# Altium PCB Template.PcbDoc
Units mm, origin at the board's own origin, x right, y up, seen from the top; angles counter-clockwise.
Board outline 80 x 60 mm, 4 copper layers (Top Layer, GroundPlane, PowerPlane, Bottom Layer), stack 1.483 mm thick; 88 components, 48 nets, 290 pads, 16 vias.
Unrouted connection lines stored in the file: 177.
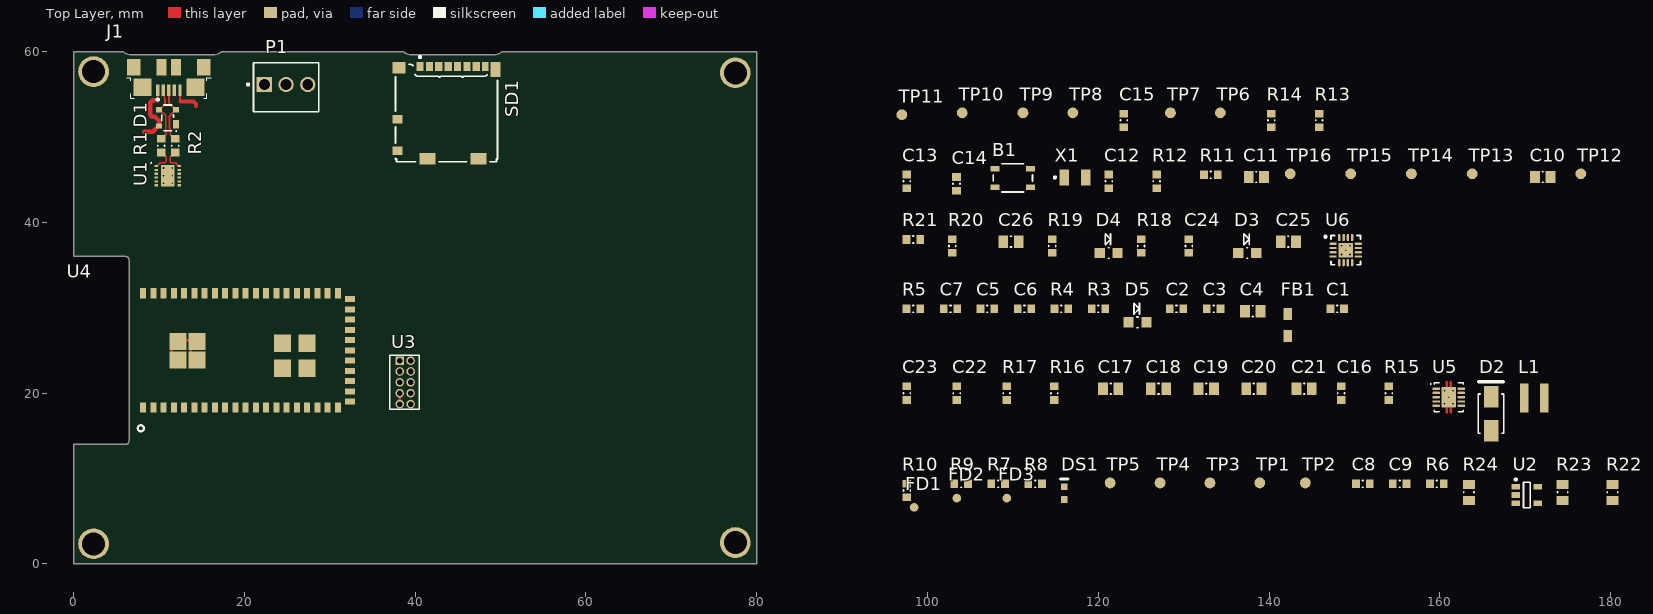
[diagram p0: Top Layer view]
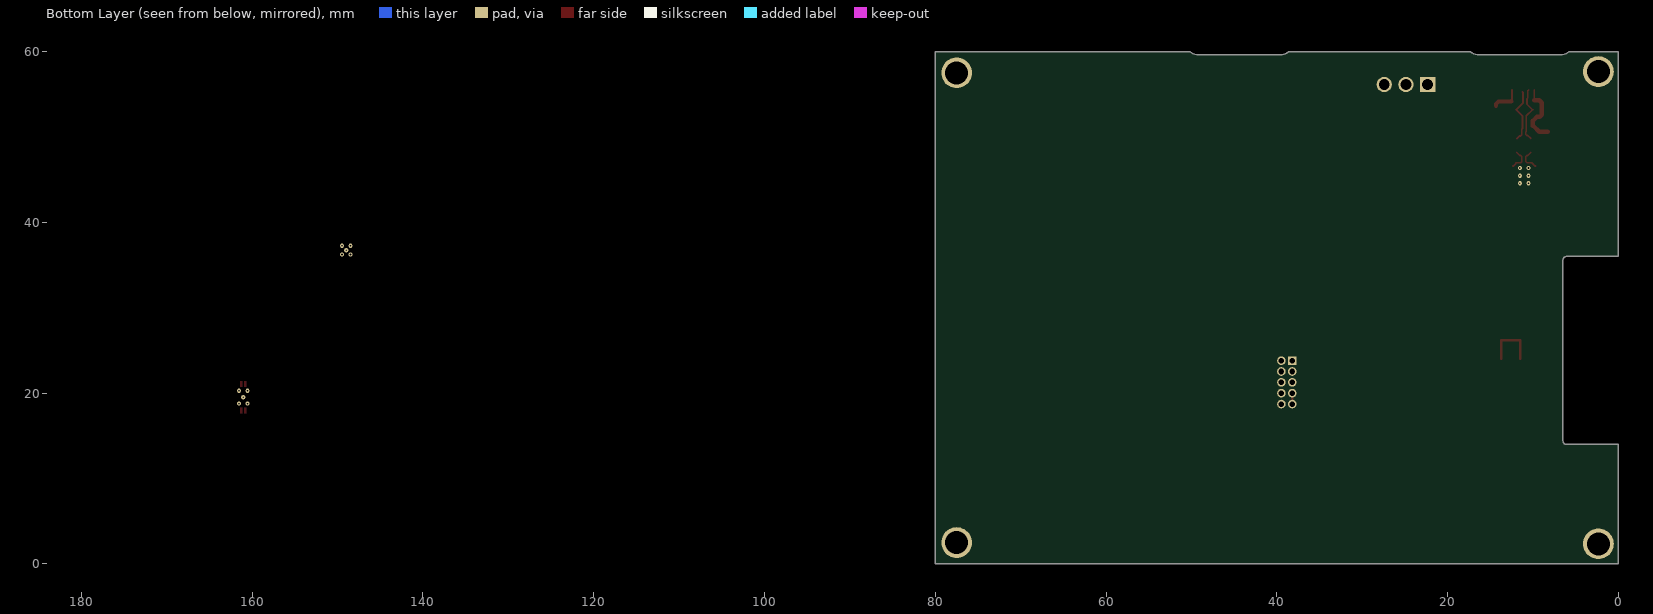
[diagram p1: Bottom Layer view, seen from below]

## Layer stack, top to bottom
Top Solder: solder mask 0.0254, Solder Resist, Dk 3.5
Top Layer: signal copper 0.0381
Dielectric1: prepreg 0.3302, PP-006, Dk 4.1
GroundPlane: signal copper 0.0178
Dielectric 2: core 0.7112, Core-009, Dk 4.5
PowerPlane: signal copper 0.0178
Dielectric 3: prepreg 0.3302, PP-006, Dk 4.1
Bottom Layer: signal copper 0.0381
Bottom Solder: solder mask 0.0254, Solder Resist, Dk 3.5

## Board outline
6.1,14 0,14 0,0 80,0 80,60 50.175,60 50.014,59.852 49.825,59.741 49.618,59.673 49.4,59.65 39.4,59.65 39.183,59.673 38.975,59.741 38.786,59.851 38.625,59.999 17.341,60 17.18,59.852 16.991,59.741 16.784,59.673 16.566,59.65 6.566,59.65 6.349,59.673 6.141,59.741 5.952,59.851 5.791,59.999 0,60 0,36 6.1,36 6.189,35.99 6.274,35.961 6.35,35.913 6.413,35.85 6.461,35.774 6.49,35.689 6.5,35.6 6.5,14.4 6.49,14.311 6.461,14.226 6.413,14.15 6.35,14.087 6.274,14.039 6.189,14.01

## Design rules (kind name [scope] priority, off if disabled: settings)
AcuteAngle [All] p1: minimum=6.00000000000000E+0001 checktracksonly=TRUE
AssemblyTestPointUsage [All] p1 off: allowmultiple=TRUE
AssemblyTestpoint [All] p1 off: testpointundercomponent=TRUE minsize=0.762 maxsize=2.54 preferedsize=1.524 minholesize=0 maxholesize=1.016 preferedholesize=0.813 testpointgrid=0.025 usegrid=FALSE gridtolerance=0 allowsidebottom=TRUE
BoardOutlineClearance "BoardOutlineClearance_Inner Layer" [OnLayer('GroundPlane')OR OnLayer('PowerPlane')] p1: gap=0.508 ignorepadtopadclearanceinfootprint=FALSE
BoardOutlineClearance BoardOutlineClearance_OuterLayers [All] p2: gap=0.254 ignorepadtopadclearanceinfootprint=FALSE except(0.508: SMDPad-OutlineEdge SMDPad-CavityEdge SMDPad-CutoutEdge THPad-OutlineEdge THPad-CavityEdge THPad-CutoutEdge)
Clearance [All] p1: gap=0.152 ignorepadtopadclearanceinfootprint=FALSE except(0.254: SMDPad-THPad)
DiffPairsRouting [All] p1: maxlimit=0.254 minlimit=0.152 mostfreqgap=0.254 toplayer_minwidth=0.152 toplayer_maxwidth=0.635 toplayer_prefwidth=0.381 midlayer1_minwidth=0.152 midlayer1_maxwidth=0.635 midlayer1_prefwidth=0.381 midlayer2_minwidth=0.152 midlayer2_maxwidth=0.635 midlayer2_prefwidth=0.381 bottomlayer_minwidth=0.152 bottomlayer_maxwidth=0.635 bottomlayer_prefwidth=0.381 maxuncoupledlength=12.7
FabricationTestPointUsage [All] p1 off: valid=0 allowmultiple=TRUE
FabricationTestpoint [All] p1 off: side=2 testpointundercomponent=TRUE minsize=0.762 maxsize=2.54 preferedsize=1.524 minholesize=0 maxholesize=1.016 preferedholesize=0.813 testpointgrid=0.025 allowsidebottom=TRUE usegrid=FALSE gridtolerance=0
HoleSize [All] p1: absolutevalues=TRUE maxlimit=3.81 minlimit=0.203 maxpercent=80.000 minpercent=20.000
MinimumAnnularRing [All] p1: minimumring=0.152
MinimumSolderMaskSliver [All] p1: minsoldermaskwidth=0.051
PlaneClearance [All] p1: clearance=0.254
PlaneConnect [All] p1: pad.planeconnectstyle=Relief pad.reliefexpansion=0.508 pad.reliefentries=4 pad.reliefconductorwidth=0.254 pad.reliefairgap=0.254 via.planeconnectstyle=Direct via.reliefexpansion=0.508 via.reliefentries=4 via.reliefconductorwidth=0.254 via.reliefairgap=0.254
PolygonConnect [All] p1: thpad.connectstyle=Relief thpad.reliefconductorwidth=0.254 thpad.reliefentries=4 thpad.polygonreliefangle="90 Angle" thpad.airgapwidth=0.203 smdpad.connectstyle=Relief smdpad.reliefconductorwidth=0.254 smdpad.reliefentries=4 smdpad.polygonreliefangle="90 Angle" smdpad.airgapwidth=0.203 via.connectstyle=Direct via.reliefconductorwidth=0.254 via.reliefentries=4 via.polygonreliefangle="90 Angle" via.airgapwidth=0.203
RoutingVias [All] p1: holewidth=0.203 width=0.508 viastyle="Through Hole" minholewidth=0.203 minwidth=0.508 maxholewidth=0.762 maxwidth=1.27
SMDNeckDown [All] p1: percent=90.000
SMDToCorner [All] p1: distance=0
SMDToPlane [All] p1: distance=0
SilkToSilkClearance [All] p1: silktosilkclearance=0
SilkToSolderMaskClearance [IsPad] p1: minsilkscreentomaskgap=0.051 clearancetoexposedcopper=TRUE
SolderMaskExpansion [All] p1: expansion=0.051 istentingtop=FALSE
UnRoutedNet [All] p1: checkbadconnections=TRUE
ViasUnderSMD [All] p1: allowed=FALSE
Width [All] p1: maxlimit=25.4 minlimit=0.152 preferedwidth=0.254
18 further rules are at their usual default settings.

## Classes and differential pairs
component class U_Thumbstick: R31 U6
component class Designator: C23
component class U_Memory: C12 R27 R28 SD1 TP15 TP17 TP18 TP19 TP20 TP21
component class U_MCU: B2 C8 C9 C10 C11 C12 D3 R15 R16 R25 R26 R31 TP12 TP14 TP21 X1
component class U_3.3VBuck: C14 C16 C17 L1 R23 R24 R25 R26 R27 U3
component class U_FTDI: C1 C2 C3 C4 C5 C6 C7 D2 FB1 J4 R1 R2 R3 R4 R5 U1
component class U_Audio: C18 C19 C20 C21 C22 J4 R28 R29 R30 U5
component class MAIN: DS1 FD1 FD2 FD3 J2 P1 P2 R6 R10 R12 R17 R18 R19 R20 R25 R28 TP1 TP2 TP3 TP4 TP5 TP15 TP17 TP18 TP19 TP20
differential pair USB_FTDI_DATA_4: +USB_FTDI_DATA_P -USB_FTDI_DATA_N
differential pair USB_DATA: +USB_DATA_P -USB_DATA_N

## Components (designator, comment, footprint, x,y, rotation, side; value= is the part's Value field where it differs from the comment)
B1 "PTS810 SJK 250 SMTR LFS" "PTS810 SJK 250 SMTR LFS" 110,45.2 r0 top (schematic designator B2)
C1 "100nF 16V" CAPC0603(1608)100_N 147.984,29.857 r0 top value=100nF
C2 "10nF 16V" CAPC0603(1608)100_N 129.163,29.857 r0 top value=10nF
C3 "100nF 16V" CAPC0603(1608)100_N 133.506,29.857 r0 top value=100nF
C4 "4.7uF 16V" CAPC0805(2012)145_N 138.078,29.603 r0 top value=4.7uF
C5 "47pF 16V" CAPC0603(1608)100_N 107.014,29.857 r0 top value=47pF
C6 "47pF 16V" CAPC0603(1608)100_N 111.358,29.857 r0 top value=47pF
C7 "100nF 16V" CAPC0603(1608)100_N 102.696,29.857 r0 top value=100nF
C8 "1uF 16V" CAPC0603(1608)100_N 150.982,9.359 r0 top value=1uF
C9 "1uF 16V" CAPC0603(1608)100_N 155.3,9.359 r0 top value=10uF
C10 "10uF 16V" CAPC0805(2012)145_N 172.038,45.3 r0 top value=10uF
C11 "CAP 10uF 16V 0805(2012)" CAPC0805(2012)145_N 138.51,45.3 r0 top value=1uF
C12 "1uF 16V" CAPC0603(1608)100_N 121.238,44.792 r90 top (schematic designator B1)
C13 "18pF 16V" CAPC0603(1608)100_N 97.591,44.792 r90 top value=18pF (schematic designator C12)
C14 "18pF 16V" CAPC0603(1608)100_N 103.4,44.5 r90 top value=18pF (schematic designator C13)
C15 "CAP 100nF 16V 0603(1608)" CAPC0603(1608)100_N 122.991,51.93 r90 top value=100nF (schematic designator C14)
C16 "1uF 16V" CAPC0603(1608)100_N 148.442,20.002 r90 top value=4.7uF
C17 "22uF 10V" CAPC0805(2012)145_N 121.441,20.51 r0 top value=22uF
C18 "22uF 10V" CAPC0805(2012)145_N 127.055,20.51 r0 top value=220pF
C19 "22uF 10V" CAPC0805(2012)145_N 132.643,20.51 r0 top value=1uF
C20 "22uF 10V" CAPC0805(2012)145_N 138.231,20.51 r0 top value=10uF
C21 "22uF 10V" CAPC0805(2012)145_N 144.098,20.51 r0 top value=1uF
C22 "100nF 16V" CAPC0603(1608)100_N 103.433,20.002 r90 top value=220pF
C23 "CAP 820pF 10V 0603(1608)" CAPC0603(1608)100_N 97.591,20.002 r90 top value=100nF
C24 "1uF 16V" CAPC0603(1608)100_N 130.611,37.223 r90 top value=120pF (schematic designator C15)
C25 "4.7uF 16V" CAPC0805(2012)145_N 142.269,37.731 r0 top (schematic designator D1)
C26 "4.7uF 16V" CAPC0805(2012)145_N 109.783,37.731 r0 top (schematic designator J1)
D1 "PRTR5V0U2X,215" NXP-SOT143B-4_V 11.02,52.236 r180 top (schematic designator D2)
D2 "B340A-13-F" DIOD-SMA-2_V 165.993,17.589 r90 top (schematic designator J4)
D3 "LTST-C170CKT" LTST-C170CKT_V 137.443,36.41 r0 top
D4 "LTST-C170GKT" LTST-C170GKT_V 121.213,36.41 r0 top (schematic designator P2)
D5 "LTST-C170CKT" LTST-C170CKT_V 124.591,28.282 r0 top value="10000.00 Ohm" (schematic designator R14)
DS1 "LTST-C191KGKT" LITE-ON-LTST-C191KRKT-2_V 116.006,8.292 r90 top
FB1 "BLM21PG221SN1D" MURA-BLM21-B20-CHIP-2_V2 142.168,27.977 r90 top
FD1 "40x100mm" Fiducial_FT 98.429,6.616 r0 top
FD2 "40x100mm" Fiducial_FT 103.433,7.708 r0 top
FD3 "40x100mm" Fiducial_FT 109.3,7.708 r0 top
J1 "ZX62R-B-5P" HIRO-ZX62R-B-5P_V 11.165,56.828 r180 top (schematic designator J2)
L1 "XFL4020-102MEC" COIL-XFL4020_V 171.048,19.418 r0 top value=470nH
P1 "640456-3" TECO-640456-3 24.892,56.134 r180 top
R1 "27R 1%" RESC0603(1608)_N 10.262,48.971 r270 top value="27.00 Ohm"
R2 "27R 1%" RESC0603(1608)_N 11.913,48.971 r270 top value="27.00 Ohm"
R3 "1K 1%" RESC0603(1608)_N 120.019,29.857 r0 top value="1000.00 Ohm"
R4 "Jumper" RESC0603(1608)_N 115.676,29.857 r0 top value="0.00 Ohm"
R5 "1K 1%" RESC0603(1608)_N 98.353,29.857 r0 top value="1000.00 Ohm"
R6 "1K 1%" RESC0603(1608)_N 159.643,9.359 r0 top value="0.00 Ohm"
R7 "1K 1%" RESC0603(1608)_N 108.284,9.359 r0 top value="1000.00 Ohm" (schematic designator R10)
R8 "27R 1%" RESC0603(1608)_N 112.602,9.359 r0 top value="27.00 Ohm" (schematic designator R11)
R9 "27R 1%" RESC0603(1608)_N 103.941,9.359 r0 top value="27.00 Ohm" (schematic designator R12)
R10 "27R 1%" RESC0603(1608)_N 97.591,8.597 r90 top value="27.00 Ohm" (schematic designator R13)
R11 "10K 1%" RESC0603(1608)_N 133.176,45.554 r0 top value="10000.00 Ohm" (schematic designator R17)
R12 "100R 1%" RESC0603(1608)_N 126.826,44.792 r90 top value="100.00 Ohm" (schematic designator R18)
R13 "10K 1% 0603(1608)" RESC0603(1608)_N 145.851,51.93 r90 top value="10000.00 Ohm" (schematic designator R19)
R14 "10K 1% 0603(1608)" RESC0603(1608)_N 140.263,51.93 r90 top value="10000.00 Ohm" (schematic designator R20)
R15 "150K 1% 0603(1608)" RESC0603(1608)_N 154.03,20.002 r90 top value="100.00 Ohm"
R16 "39K 1% 0603(1608)" RESC0603(1608)_N 114.863,20.002 r90 top value="10000.00 Ohm"
R17 "68K1 1%" RESC0603(1608)_N 109.275,20.002 r90 top value="453000.00 Ohm" (schematic designator R25)
R18 "1K 1%" RESC0603(1608)_N 125.023,37.223 r90 top value="100000.00 Ohm" (schematic designator R26)
R19 "1K 1%" RESC0603(1608)_N 114.609,37.223 r90 top value="100000.00 Ohm" (schematic designator R27)
R20 "1K13 1%" RESC0603(1608)_N 102.925,37.223 r90 top value="100.00 Ohm" (schematic designator R28)
R21 "1K13 1%" RESC0603(1608)_N 98.353,37.985 r0 top value="100.00 Ohm" (schematic designator R29)
R22 "Jumper" RESC0805(2012)_N 180.217,8.369 r90 top (schematic designator R30)
R23 "Jumper" RESC0805(2012)_N 174.375,8.369 r90 top value="0.00 Ohm"
R24 "Jumper" RESC0805(2012)_N 163.402,8.369 r90 top value="0.00 Ohm"
SD1 "104031-0811" MOLX-104031-0811_V 43.688,52.832 r180 top locked
TP1 "0.1\" Pad" PCBComponent 138.917,9.486 r90 top
TP2 "0.1\" Pad" PCBComponent 144.251,9.486 r90 top
TP3 "0.1\" Pad" PCBComponent 133.075,9.486 r90 top
TP4 "0.1\" Pad" PCBComponent 127.233,9.486 r90 top
TP5 "0.1\" Pad" PCBComponent 121.391,9.486 r90 top
TP6 "0.1\" Pad" PCBComponent 134.294,52.819 r90 top (schematic designator TP16)
TP7 "0.1\" Pad" PCBComponent 128.452,52.819 r90 top (schematic designator TP17)
TP8 "0.1\" Pad" PCBComponent 117.022,52.819 r90 top (schematic designator TP18)
TP9 "0.1\" Pad" PCBComponent 111.18,52.819 r90 top (schematic designator TP19)
TP10 "0.1\" Pad" PCBComponent 104.068,52.819 r90 top (schematic designator TP20)
TP11 "0.1\" Pad" PCBComponent 97,52.6 r90 top (schematic designator TP21)
TP12 "0.1\" Pad" PCBComponent 176.509,45.681 r90 top (schematic designator TP11)
TP13 "0.1\" Pad" PCBComponent 163.783,45.681 r90 top (schematic designator TP12)
TP14 "0.1\" Pad" PCBComponent 156.671,45.681 r90 top (schematic designator TP13)
TP15 "0.1\" Pad" PCBComponent 149.559,45.681 r90 top (schematic designator TP14)
TP16 "0.1\" Pad" PCBComponent 142.473,45.681 r90 top (schematic designator TP15)
U1 "FT234XD-R" DFN-12_V 11.045,45.459 r0 top
U2 "MIC5504-3.3YM5-TR" MCHP-SOT-23-M5_V 170.184,8.064 r0 top value="10000.00 Ohm" (schematic designator R31)
U3 "20021111-00010T4LF" 20021111-00010T4LF 39.472,21.26 r270 top (schematic designator U2)
U4 "SAMW25H18-MR510PB" SAMW25H18-MR510PB 20.265,25 r180 top locked (schematic designator U3)
U5 "TPS61087DRCR" DRC0010J_V 161.04,19.519 r0 top
U6 "BQ24075RGTRG4" RGT16-1700X1700TP 148.975,36.74 r0 top
X1 "ABS07-32.768KHz-T" ABRA-ABS07-2_V 117.276,45.249 r0 top

## Footprints (in the part's own frame and the unit in brackets; to place one, negate y for a bottom-side part, rotate by r counter-clockwise, add the part's x,y. Pads: shape width x height; smd on the part's side, far side on the other; paste and mask are expansions set on the pad)
20021111-00010T4LF [mm] "CONN HEADER 10POS UNSHD VERT T/H"
  rect 1.006x1.006 hole 0.65: 1(-2.54,-1.27)
  round 1.006 hole 0.65: 2(-2.54,0) 3(-1.27,-1.27) 4(-1.27,0) 5(0,-1.27) 6(0,0) 7(1.27,-1.27) 8(1.27,0) 9(2.54,-1.27) 10(2.54,0)
  silkscreen extent -3.18,-2.41 3.18,1.02, body extent -3.18,-2.33 3.18,1.06, height 5.5
ABRA-ABS07-2_V [mm] "Hand Drawn, 2-Leads, Body 3.2x1.5mm, Pitch 2.5mm"
  rect 1.1x1.9 smd: 1(-1.25,0) 2(1.25,0)
  silkscreen extent -2.47,-0.12 -2.22,0.12, body extent -1.6,-0.75 1.6,0.75, height 0.9
CAPC0603(1608)100_N [mm] "Chip Capacitor, Body 1.6x0.8mm, Height 1.0mm, IPC Medium Density"
  rect 0.9x1 smd: 1(-0.8,0) 2(0.8,0)
  silkscreen extent -0.05,-0.4 0.05,0.4, body extent -0.87,-0.48 0.88,0.47, height 1
CAPC0805(2012)145_N [mm] "Chip Capacitor, Body 2.0x1.2mm, Height 1.45mm, IPC Medium Density"
  rect 1.15x1.45 smd: 1(-0.9,0) 2(0.9,0)
  silkscreen extent -0.05,-0.62 0.05,0.63, body extent -1.1,-0.72 1.1,0.73, height 1.45
COIL-XFL4020_V [mm] "SMD, 2-Leads, Body 4x4mm, Pitch 2.37mm"
  rect 0.98x3.4 smd paste+0: 1(-1.185,0) 2(1.185,0)
  body extent -2,-2 2,2, height 2.1
DFN-12_V [mm] "SON, 12-Leads, Body 3x3mm, Pitch 0.45mm, Thermal Pad 2.5x1.6mm"
  rect 0.4x0.25 smd: 1(-1.35,1.125) 2(-1.35,0.675) 3(-1.35,0.225) 4(-1.35,-0.225) 5(-1.35,-0.675) 6(-1.35,-1.125) 7(1.35,-1.125) 8(1.35,-0.675) 9(1.35,-0.225) 10(1.35,0.225) 11(1.35,0.675) 12(1.35,1.125)
  rect 1.6x2.5 smd mask+0.102: 13(0,0)
  silkscreen extent -2,1.45 -1.9,1.55, body extent -1.5,-1.5 1.5,1.5, height 0.9
DIOD-SMA-2_V [mm] "Molded Diode, 2-Leads, Body 4.6x2.92mm"
  rect 2.5x1.7 smd: 1(-2,0) 2(2,0)
  silkscreen extent -2.3,-1.5 3.75,1.5, body extent -2.52,-1.46 2.52,1.46, height 2.4
DRC0010J_V [mm] "SON, 10-Leads, Body 3x3mm, Pitch 0.5mm, Thermal Pad 2.4x1.65mm, TI Recommended"
  rrect36% 0.85x0.28 smd paste-0.025 mask+0.07: 1(-1.475,1) 2(-1.475,0.5) 3(-1.475,0) 4(-1.475,-0.5) 5(-1.475,-1) 6(1.475,-1) 7(1.475,-0.5) 8(1.475,0) 9(1.475,0.5) 10(1.475,1)
  rrect6% 1.65x2.4 smd paste-0.825 mask+0.07: 11(0,0)
  Top Layer region: -0.39,-1.9 -0.11,-1.9 -0.11,-1.2 -0.39,-1.2
  Top Layer region: 0.39,-1.2 0.11,-1.2 0.11,-1.9 0.39,-1.9
  Top Layer region: 0.39,1.9 0.11,1.9 0.11,1.2 0.39,1.2
  Top Layer region: -0.39,1.2 -0.11,1.2 -0.11,1.9 -0.39,1.9
  silkscreen extent -2.15,-1.7 1.7,1.7, body extent -1.55,-1.55 1.55,1.55, height 1
Fiducial_FT [mil]
  round 40 smd paste-30 mask+30: ""(0,0)
HIRO-ZX62R-B-5P_V [mm] "USB Micro-B R/A Connector"
  rect 0.4x1.35 smd: 1(1.3,1.338) 2(0.65,1.338) 3(0,1.338) 4(-0.65,1.338) 5(-1.3,1.338)
  rect 2.1x2 smd: 6(-3.1,1.012) 11(3.1,1.012)
  rect 1.6x1.9 smd: 7(-4.1,-1.338) 10(4.1,-1.338)
  rect 1.2x1.9 smd: 8(-0.85,-1.338) 9(0.85,-1.338)
  silkscreen extent -4.95,-0.13 4.95,2.58, body extent -4.4,-3.95 4.4,1.78, height 2.71
LITE-ON-LTST-C191KRKT-2_V [mm] "Chip, 2-Leads, Body 1.6x0.8mm"
  rect 0.8x0.8 smd: 1(-0.75,0) 2(0.75,0)
  silkscreen extent 1.65,-0.4 1.65,0.4, body extent -0.8,-0.4 0.8,0.4, height 0.55
LTST-C170CKT_V [mm] "SMD, 2-Leads, Body 2x1.25mm"
  rect 1.2x1.2 smd: 1(-1.05,0) 2(1.05,0)
  silkscreen extent -0.41,-0.63 0.23,2.25, body extent -1,-0.63 1,0.63, height 1.1
LTST-C170GKT_V [mm] "SMD, 2-Leads, Body 2x1.25mm"
  rect 1.2x1.2 smd: 1(-1.05,0) 2(1.05,0)
  silkscreen extent -0.41,-0.63 0.23,2.25, body extent -1,-0.63 1,0.63, height 1.1
MCHP-SOT-23-M5_V [mm] "SOT-23, 5-Leads, Body 3x1.7mm, Pitch 0.95mm"
  rect 1x0.66 smd: 1(-1.3,0.95) 2(-1.3,0) 3(-1.3,-0.95) 4(1.3,-0.95) 5(1.3,0.95)
  silkscreen extent -1.42,-1.5 0.4,1.95, body extent -1.5,-1.5 1.5,1.5, height 1.45
MOLX-104031-0811_V [mm] "Micro SD, 8-Leads, Body 11.95x11.4mm, Pitch 1.1mm"
  rect 0.85x1.1 smd: 1(3.113,-5.412) 2(2.013,-5.412) 3(0.913,-5.412) 4(-0.188,-5.412) 5(-1.288,-5.412) 6(-2.387,-5.412) 7(-3.487,-5.412)
  rect 0.75x1.1 smd: 8(-4.537,-5.412)
  rect 1.2x1 smd: 9(5.748,0.738) 10(5.748,4.438)
  rect 1.55x1.35 smd: 11(5.573,-5.287)
  rect 1.17x1.8 smd: 12(-5.747,-5.062)
  rect 1.9x1.35 smd: 13(-3.722,5.413) 14(2.248,5.413)
  silkscreen extent -5.97,-6.64 5.98,5.74, body extent -5.97,-5.66 5.98,5.74, height 1.45
MURA-BLM21-B20-CHIP-2_V2 [mm] "Chip Ferrite Bead, 2-Leads, Body 2x1.25mm, Height 1.05mm, 35/70um Land Pad Thickness, 2A Rated Current"
  rect 1.4x1 smd: 1(-1.3,0) 2(1.3,0)
  body extent -1,-0.63 1,0.63, height 1.05
NXP-SOT143B-4_V [mm] "SOT143, 4-Leads, Body 3x1.4mm"
  rect 0.7x1 smd: 1(-1,0.75)
  rect 0.7x0.6 smd: 2(-1,-0.95) 3(1,-0.95) 4(1,0.95)
  silkscreen extent -1.05,-1.5 0.7,1.6, body extent -0.7,-1.5 0.7,1.5, height 1.1
PCBComponent [mm]
  round 1.27 smd mask+0: 1(0,0)
  body extent -0.63,-0.63 0.64,0.63, height 0
"PTS810 SJK 250 SMTR LFS" [mm] "SWITCH TACTILE SPST-NO 0.05A 16V"
  rect 1.05x0.65 smd: 1(-2.075,1.075) 2(2.075,1.075) 3(-2.075,-1.075) 4(2.075,-1.075)
  silkscreen extent -2.29,-1.65 2.29,1.65, body extent -2.3,-1.6 2.3,1.6, height 2.5
RESC0603(1608)_N [mm] "Chip Resistor, Body 1.6x0.8mm, IPC Medium Density"
  rect 0.9x1 smd: 1(-0.8,0) 2(0.8,0)
  silkscreen extent -0.05,-0.4 0.05,0.4, body extent -0.85,-0.47 0.85,0.47, height 0.6
RESC0805(2012)_N [mm] "Chip Resistor, Body 2.0x1.3mm, IPC Medium Density"
  rect 1.05x1.4 smd: 1(-0.95,0) 2(0.95,0)
  silkscreen extent -0.05,-0.6 0.05,0.6, body extent -1.1,-0.67 1.1,0.68, height 0.7
RGT16-1700X1700TP [mm] "QFN, 16-Leads, Body 3x3mm, Pitch 0.5mm, Thermal Pad 1.7x1.7mm, TI Recommended"
  oval 0.85x0.28 smd paste-0.025 mask+0.07: 1(-1.475,0.75) 2(-1.475,0.25) 3(-1.475,-0.25) 4(-1.475,-0.75) 9(1.475,-0.75) 10(1.475,-0.25) 11(1.475,0.25) 12(1.475,0.75)
  oval 0.28x0.85 smd paste-0.025 mask+0.07: 5(-0.75,-1.475) 6(-0.25,-1.475) 7(0.25,-1.475) 8(0.75,-1.475) 13(0.75,1.475) 14(0.25,1.475) 15(-0.25,1.475) 16(-0.75,1.475)
  rect 1.7x1.7 smd paste-0.85 mask+0.07: 17(0,0)
  silkscreen extent -2.5,-1.73 1.73,1.73, body extent -1.57,-1.57 1.58,1.58, height 1
SAMW25H18-MR510PB [mm] "RF TXRX MODULE WIFI TRACE ANT"
  rect 2x2 smd: 0(-7.065,-0.839) 0(-7.065,2.085) 0(-4.21,-0.839) 0(-4.21,2.085)
  rect 2x2 smd mask+0.127: 0(5.828,-1.045) 0(5.828,1.137) 0(8.046,-1.045) 0(8.046,1.137)
  rect 0.7x1.2 smd: 1(12.121,6.7) 2(10.921,6.7) 3(9.721,6.7) 4(8.521,6.7) 5(7.321,6.7) 6(6.121,6.7) 7(4.921,6.7) 8(3.721,6.7) 9(2.521,6.7) 10(1.321,6.7) 11(0.121,6.7) 12(-1.079,6.7) 13(-2.279,6.7) 14(-3.479,6.7) 15(-4.679,6.7) 16(-5.879,6.7) 17(-7.079,6.7) 18(-8.279,6.7) 19(-9.479,6.7) 20(-10.679,6.7) 32(-10.679,-6.7) 33(-9.479,-6.7) 34(-8.279,-6.7) 35(-7.079,-6.7) 36(-5.879,-6.7) 37(-4.679,-6.7) 38(-3.479,-6.7) 39(-2.279,-6.7) 40(-1.079,-6.7) 41(0.121,-6.7) 42(1.321,-6.7) 43(2.521,-6.7) 44(3.721,-6.7) 45(4.921,-6.7) 46(6.121,-6.7) 47(7.321,-6.7) 48(8.521,-6.7) 49(9.721,-6.7) 50(10.921,-6.7) 51(12.121,-6.7)
  rect 1.2x0.7 smd: 21(-12.12,6.004) 22(-12.12,4.804) 23(-12.12,3.604) 24(-12.12,2.404) 25(-12.12,1.204) 26(-12.12,0.004) 27(-12.12,-1.196) 28(-12.12,-2.396) 29(-12.12,-3.596) 30(-12.12,-4.796) 31(-12.12,-5.996)
  silkscreen extent 12.02,8.76 12.74,9.48, body extent -12.89,-7.45 20.98,7.46, height 3.37
TECO-640456-3 [mm] "Through Hole, 3-Leads, Body 7.62x5.72mm, Pitch 2.54mm"
  rect 1.8x1.8 hole 1.27 paste+0: 1(2.54,0)
  round 1.8 hole 1.27 paste+0: 2(0,0) 3(-2.54,0)
  silkscreen extent -3.81,-2.54 4.59,3.18, body extent -3.81,-2.54 3.81,3.18, height 10.03

## Part data
B1: "SWITCH TACTILE SPST-NO 0.05A 16V Tactile Switch SPST-NO Top Actuated Surface Mount", Color=White, Current Rating="50 mA", Manufacturer="ITT /  C&K Components", Manufacturer Part Number=PTS810SJK250SMTRLFS, Operating Force="2.6 N", Operating Temperature Range="- 40 C to + 85 C", Supplier Part Number 1=CKN10503CT-ND, Voltage Rating DC="16 VDC", Actuator=Oval, Brand="C&K Components", ComponentLink1Description=https://datasheet.ciiva.com/18514/pts810-4mar13-18514061.pdf, ComponentLink1URL=https://datasheet.ciiva.com/18514/pts810-4mar13-18514061.pdf, ComponentLink2Description=https://datasheet.ciiva.com/18514/pts810-4mar13-18514062.pdf, ComponentLink2URL=https://datasheet.ciiva.com/18514/pts810-4mar13-18514062.pdf, ComponentLink3Description=https://datasheet.ciiva.com/18514/pts810-4mar13-18514063.pdf, ComponentLink3URL=https://datasheet.ciiva.com/18514/pts810-4mar13-18514063.pdf, Contact Form=SPST, Contact Plating=Silver, Factory Pack Quantity=2900, Mounting Direction=Straight, Mounting Style=SMD/SMT, Packaging=Reel, Part # Aliases=Y97LT25B5DBFP, Product Category="Tactile Switches", RoHS=Details, Series=PTS810, Stem Height="2.5 mm", Supplier 1=Digi-Key, Switch Function="OFF - (ON)", Termination Style="J Form Lead", Travel="0.15 mm"
C1 C3 C7 C15 C23: library part CMP-1035-02584-1, "CAP 100nF 16V ±10% 0603 (1608 Metric) Thickness 1mm SMD", Case-EIA=0603, Case-Metric=1608, Rated Voltage="16 V", Tolerance=Â±10%, Max Thickness="1 mm", Technology=SMT
C2: library part CMP-1035-02311-1, "CAP 10nF 16V ±10% 0603 (1608 Metric) Thickness 1mm SMD", Case-EIA=0603, Case-Metric=1608, Rated Voltage="16 V", Tolerance=Â±10%, Max Thickness="1 mm", Technology=SMT
C4 C16: library part CMP-1036-04893-1, "CAP 4.7uF 16V -20% to +80% 0805 (2012 Metric) Thickness 1.45mm SMD", Case-EIA=0805, Case-Metric=2012, Rated Voltage="16 V", Tolerance="-20% to +80%", Max Thickness="1.45 mm", Technology=SMT
C5 C6: library part CMP-1035-01048-1, "CAP 47pF 16V ±0.5pF 0603 (1608 Metric) Thickness 1mm SMD", Case-EIA=0603, Case-Metric=1608, Rated Voltage="16 V", Tolerance=Â±0.5pF, Max Thickness="1 mm", Technology=SMT
C8 C11 C19 C21: library part CMP-1035-02736-1, "CAP 1uF 16V ±5% 0603 (1608 Metric) Thickness 1mm SMD", Case-EIA=0603, Case-Metric=1608, Rated Voltage="16 V", Tolerance=Â±5%, Max Thickness="1 mm", Technology=SMT
C9 C10 C20: library part CMP-1036-04927-1, "CAP 10uF 16V ±10% 0805 (2012 Metric) Thickness 1.45mm SMD", Case-EIA=0805, Case-Metric=2012, Rated Voltage="16 V", Tolerance=Â±10%, Max Thickness="1.45 mm", Technology=SMT
C12: library part "PTS810 SJK 250 SMTR LFS", "SWITCH TACTILE SPST-NO 0.05A 16V Tactile Switch SPST-NO Top Actuated Surface Mount", Color=White, Current Rating="50 mA", Manufacturer="ITT /  C&K Components", Manufacturer Part Number=PTS810SJK250SMTRLFS, Operating Force="2.6 N", Operating Temperature Range="- 40 C to + 85 C", Supplier Part Number 1=CKN10503CT-ND, Voltage Rating DC="16 VDC", Actuator=Oval, Brand="C&K Components", ComponentLink1Description=https://datasheet.ciiva.com/18514/pts810-4mar13-18514061.pdf, ComponentLink1URL=https://datasheet.ciiva.com/18514/pts810-4mar13-18514061.pdf, ComponentLink2Description=https://datasheet.ciiva.com/18514/pts810-4mar13-18514062.pdf, ComponentLink2URL=https://datasheet.ciiva.com/18514/pts810-4mar13-18514062.pdf, ComponentLink3Description=https://datasheet.ciiva.com/18514/pts810-4mar13-18514063.pdf, ComponentLink3URL=https://datasheet.ciiva.com/18514/pts810-4mar13-18514063.pdf, Contact Form=SPST, Contact Plating=Silver, Factory Pack Quantity=2900, Mounting Direction=Straight, Mounting Style=SMD/SMT, Packaging=Reel, Part # Aliases=Y97LT25B5DBFP, Product Category="Tactile Switches", RoHS=Details, Series=PTS810, Stem Height="2.5 mm", Supplier 1=Digi-Key, Switch Function="OFF - (ON)", Termination Style="J Form Lead", Travel="0.15 mm"
C13 C14: library part CMP-1035-00738-1, "CAP 18pF 16V ±5% 0603 (1608 Metric) Thickness 1mm SMD", Case-EIA=0603, Case-Metric=1608, Rated Voltage="16 V", Tolerance=Â±5%, Max Thickness="1 mm", Technology=SMT
C17: library part CMP-1036-04944-1, "CAP 22uF 10V ±20% 0805 (2012 Metric) Thickness 1mm SMD", Case-EIA=0805, Case-Metric=2012, Rated Voltage="10 V", Tolerance=Â±20%, Max Thickness="1 mm", Technology=SMT
C18 C22: library part CMP-1035-01455-1, "CAP 220pF 10V ±2% 0603 (1608 Metric) Thickness 1mm SMD", Case-EIA=0603, Case-Metric=1608, Rated Voltage="10 V", Tolerance=Â±2%, Max Thickness="1 mm", Technology=SMT
C24: library part CMP-1035-01312-1, "CAP 120pF 25V ±1% 0603 (1608 Metric) Thickness 1mm SMD", Case-EIA=0603, Case-Metric=1608, Rated Voltage="25 V", Tolerance=Â±1%, Max Thickness="1 mm", Technology=SMT
C25 D3: library part CMP-1674-00001-5, "LED Uni-Color Red, 100 mW, 200 mA, -55 to 85 degC, 2-Pin SMD, RoHS, Tape and Reel", Colour=Red, Manufacturer=Lite-On, Max Operating Temperature="85 degC", Min Operating Temperature="-55 degC", Package Quantity=3000, ComponentLink1Description="Manufacturer URL", ComponentLink1URL=http://www.us.liteon.com/, ComponentLink2Description=Datasheet, ComponentLink2URL=http://media.digikey.com/pdf/Data%20Sheets/Lite-On%20PDFs/LTST-C170CKT.pdf, DatasheetVersion=03/2003, Height="1.1 mm", Length="2 mm", Mount="Surface Mount", Mounting Technology="Surface Mount", PackageDescription="2-Pin Surface Mount Device, Body 2 x 1.25 mm", PackageReference=C170CKT, Packaging="Tape and Reel", Pins=2, RoHSCompliant=true
C26: library part CMP-47995-000002-1, "CONN PWR JACK 2.1X5.5MM SOLDER", Case/Package=SMD/SMT, Color=Black, Current Rating=5A, Manufacturer=Switchcraft, Manufacturer Part Number=RASM722PTR13X, Package Quantity=120, Supplier Part Number 1=SC2028-1-ND, Category="Power Connectors", ComponentLink1Description=https://datasheet.ciiva.com/17/edg4-17820.pdf?src-supplier=Digi-Key, ComponentLink1URL=https://datasheet.ciiva.com/17/edg4-17820.pdf?src-supplier=Digi-Key, ComponentLink2Description=https://datasheet.ciiva.com/18496/edg4-18496955.pdf?src-supplier=Digi-Key, ComponentLink2URL=https://datasheet.ciiva.com/18496/edg4-18496955.pdf?src-supplier=Digi-Key, ComponentLink3Description=https://datasheet.ciiva.com/18496/edg4-18496956.pdf?src-supplier=Digi-Key, ComponentLink3URL=https://datasheet.ciiva.com/18496/edg4-18496956.pdf?src-supplier=Digi-Key, ComponentLink4Description=https://datasheet.ciiva.com/18496/edg4-18496957.pdf?src-supplier=Digi-Key, ComponentLink4URL=https://datasheet.ciiva.com/18496/edg4-18496957.pdf?src-supplier=Digi-Key, Connector Type=Jack, Contact Material="Copper Alloy", Contact Plating=Tin, Gender=Male, Housing Color=Black, Housing Material=Thermoplastic, Mount="Surface Mount", Pricing 1="1=2.04000, 10=1.95800, 25=1.79520, 50=1.71360 (USD)", RoHS=Yes, Shielding=Unshielded, Stock 1=5317, Supplier 1=Digi-Key, Termination=Solder
D1: library part CMP-2000-05285-1, "Ultra Low Capacitance Double Rail-to-Rail ESD Protection Diode, 5.5 V, 1 pF, -40 to 85 degC, 4-Pin SOT143B, RoHS, Tape and Reel", Capacitance Value=16pF, ESD Protection Voltage=8KV@ContactDisc, Leakage Current=0.1uA, Manufacturer="NXP Semiconductors", Operating Temperature Classification=Industrial, Operating Temperature Max Deg. C=85C, Operating Temperature Min Deg. C=-40C, Operating Temp Range=-40Cto85C, Package / Case=SOT, Reverse Breakdown Voltage=6V, Reverse Stand-off Voltage=5.5V, Configuration=Quad, Datasheet URL=https://datasheet.ciiva.com/4479/prtr5v0u2x-102853-4479461.pdf, Datasheet Version="Rev. 02, 01/2008", Direction Type=Uni-Directional, Leakage Current (Max)=0.1uA, Manufacturer URL=http://www.nxp.com/, Mounting=SurfaceMount, Mounting Style=SurfaceMount, Number of Elements=1, Package Type=SOT, Packaging=TapeandReel, Pin Count=3+Tab, Polarity=Uni-Directional, Product Depth (mm)=1.4mm, Product Height (mm)=1mm, Product Length (mm)=3mm, Rad Hardened=No, Suppressor Type=DiodeArrays, Working Voltage=5.5V, Working Voltage (Max)=5.5V
D2: library part CMP-2000-05628-3, "CONN HEADER VERT 2POS 1.25MM", Ambient Temperature Range High=+85°C, Ambient Temperature Range Low=-40°C, Current Rating=1A, Manufacturer=Molex, Manufacturer Part Number=53047-0210, Package=0, Temperature="-40°C to +85°C", Voltage Rating=125V, Automotive=No, Category=Conn, ComponentLink2Description=Datasheet, ComponentLink2URL=http://www.molex.com/webdocs/datasheets/pdf/en-us/0530470210_PCB_HEADERS.pdf, Conn Gender=Male, Conn Orientation=Vertical, Contact Material=Tin, Device Class L1=Connectors, Device Class L2="Headers and Wire Housings", Device Class L3=unset, Digikey Description="CONN HEADER VERT 2POS 1.25MM", Footprint Url=https://www.molex.com/pdm_docs/sd/530470210_sd.pdf, Height=4.4mm, Lead Free=Yes, Mouser Description="1.25mm Pitch PicoBlade™ Wire-to-Board Header, Vertical, with Friction Lock, 2 Circuits", Number of Contacts=2, Number of Rows=1, Octopart=https://octopart.com/53047-0210-molex-276772, Pitch=1.25mm, RoHS=TRUE, Temperature Range High=+85°C, Temperature Range Low=-40°C
D4: library part B4B-PH-SM4-TB(LF)(SN), "B4B-PH-SM4-TB(LF)(SN)", Color=Natural,White, Contact Resistance=20mR, Current Rating=2A, Flammability Rating="UL94 V-0", Housing Color=Beige, Insulation Resistance=1GR, Manufacturer=JST, Max Operating Temperature=85°C, Max Voltage Rating (AC)=100V, Min Operating Temperature=-25°C, Supplier Part Number 1=455-1736-1-ND, Category=Connectors, ComponentLink1Description=https://datasheet.ciiva.com/8052/1699381-8052048.pdf?src-supplier=Element14, ComponentLink1URL=https://datasheet.ciiva.com/8052/1699381-8052048.pdf?src-supplier=Element14, ComponentLink2Description=https://datasheet.ciiva.com/11747/0900766b80ddea81-11747504.pdf?src-supplier=RSComponents, ComponentLink2URL=https://datasheet.ciiva.com/11747/0900766b80ddea81-11747504.pdf?src-supplier=RSComponents, ComponentLink3Description=https://datasheet.ciiva.com/6747/80567-6747409.pdf?src-supplier=Newark, ComponentLink3URL=https://datasheet.ciiva.com/6747/80567-6747409.pdf?src-supplier=Newark, ComponentLink4Description=https://datasheet.ciiva.com/727/eph-727525.pdf?src-supplier=Digi-Key, ComponentLink4URL=https://datasheet.ciiva.com/727/eph-727525.pdf?src-supplier=Digi-Key, ComponentLink5Description=https://datasheet.ciiva.com/712/eph-712582.pdf?src-supplier=Digi-Key, ComponentLink5URL=https://datasheet.ciiva.com/712/eph-712582.pdf?src-supplier=Digi-Key, ComponentLink6Description=https://datasheet.ciiva.com/712/eph-712583.pdf?src-supplier=Digi-Key, ComponentLink6URL=https://datasheet.ciiva.com/712/eph-712583.pdf?src-supplier=Digi-Key, Connector Type="Male Pin", Contact Material="Copper Alloy,Bronze,Tin,Brass", Contact Mating Length=0.13inch, Contact Plating=Tin,Copper, Depth=5mm, Fastening Type=Detent, Gender=Male, Height=9.4mm, Housing Material=Polyamide, Lead Free="Lead Free", Lead Pitch=2mm, Length=11.95mm, Manufacturer Part Number=B4B-PH-SM4-TB(LF)(SN), Max Current Rating=2A, Mount="Surface Mount", Number of Contacts=4, Number of Poles=4, Number of Positions=4, Number of Rows=1, Orientation=Straight, Packaging="Tape and Reel", Pitch=2mm, REACH SVHC="No SVHC", RoHS=Yes, Supplier 1=Digi-Key, Termination=Solder, Voltage Rating=100V, Voltage Rating (AC)=100V, Width=5.5mm, Working Voltage=100V
D5 R11 R13 R14 R16 U2: library part CMP-1012-00623-1, "10K 0.1W 1% 0603 (1608 Metric)  SMD", Case-EIA=0603, Case-Metric=1608, Power="0.1 W", Tolerance="1 %", Technology=SMT
DS1: library part CMP-2000-05198-1, "Chip LED, Green, 574 nm, 40 pF, -55 to 85 degC, 2-Pin SMD, RoHS, Tape and Reel", Emitting Color=YellowGreen, Forward Current=30mA, Forward Voltage=2.4V, Manufacturer=Lite-On, Operating Temp Range=-55Cto85C, Operating Temperature Classification=Industrial, Package Type=ChipLed, Power Dissipation=75W, Reverse Voltage=5V, Test Current (It)=20mA, Chip Material=AlGaInP, Datasheet URL=http://download.siliconexpert.com/pdfs/2007/08/26/semi_b/manual/lot/ds/ltst-c191kgkt.pdf, Datasheet Version=Jan-07, DELETED=Compliant, Dominant Wave Length=571nm, High Brightness=Yes, Lens Dimensions=1.1X0.8X0.37mm, Lum Intensity=35mcd, Luminous Intensity=35mcd, Main Category=ChipLED, Manufacturer URL=http://www.us.liteon.com/, Mounting=SurfaceMount, Number of Elements=1, Packaging=TapeandReel, Peak Wavelength=574nm, Pin Count=2, Product Depth (mm)=0.8mm, Product Height (mm)=0.55mm, Product Length (mm)=1.6mm, Rad Hardened=No, Shape Type=Rectangular, Type=Uni-Color, Viewing Angle=130deg
FB1: library part CMP-0686-00610-2, "Chip Ferrite Bead for Power Lines, 220 Ohm, 2000 mA, -55 to 125 degC, 2 x 1.25 x 1.05 mm SMD, Tape and Reel", DC Resistance="0.045 Ohm Max.", Manufacturer=Murata, Operating Temperature Range="-55 to 125 degC", Rated Current="2000 mA", ComponentLink1Description="Manufacturer URL", ComponentLink1URL=http://www.murata.com/, ComponentLink2Description=Datasheet, ComponentLink2URL=http://www.murata.com/products/catalog/pdf/c31e.pdf, ComponentLink3Description="Package Specification", ComponentLink3URL=http://www.murata.com/products/catalog/pdf/c31e.pdf, DatasheetVersion=08/2013, Impedance (at 100 MHz)="220 Ohm +/- 25%", Mounting Technology="Surface Mount", PackageDescription="2-Pin Chip, Body 2 x 1.25 mm", PackageReference=BLM21_H1050-2, Packing="Tape and Reel", PartNumber=BLM21PG221SN1D
FD1 FD2 FD3: library part CMP-00174-A.4, "Fiducial 40x100mm"
J1: library part CMP-0031-00001-1, "Connector; USBMicro-B,Reverse type, SMT; 5 Position; Right Angle", Operating Temperature="-30 to 85 degC", ComponentLink1Description="Manufacturer URL", ComponentLink1URL=http://www.hirose.com/â€Ž, ComponentLink2Description=Datasheet, ComponentLink2URL=http://www.hirose.co.jp/cataloge_hp/e24200011.pdf, DatasheetVersion=08/2010, Mounting Technology="Surface Mount", PackageDescription="5-Pin USB Micro-B R/A Connector", PackageReference=ZX62R-B-5P, PartNumber=ZX62R-B-5P
L1: library part CMP-08253-000017-1, "FIX IND 470NH 26.1A 2.97MOHM SMD", Inductance=470nH, Manufacturer=TDK, Manufacturer Part Number=SPM6550T-R47M-HZ, Package=SPM6550, Rms Current=20.5A, Series Resistance=2.97mΩ, Temperature="-40°C to +125°C", Temperature Range High=+125°C, Temperature Range Low=-40°C, Test Frequency=100kHz, Tolerance=20%, Automotive=Yes, Automotive Grade="Grade 1", Category=Ind, ComponentLink2Description=Datasheet, ComponentLink2URL=https://product.tdk.com/info/en/catalog/datasheets/inductor_automotive_power_spm6550-hz_en.pdf, Composition=Wirewound, Core Material=Metal, Device Class L1="Passive Components", Device Class L2=Inductors, Device Class L3="Fixed Inductors", Digikey Description="FIX IND 470NH 26.1A 2.97MOHM SMD", Height=5mm, Lead Free=Yes, Octopart=https://octopart.com/spm6550t-r47m-hz-tdk-90326484, RoHS=TRUE, Saturation Current=20.5A, Shielding=true, Standoff Height=0.15mm
P1: library part BM04B-SRSS-TBT(LF)(SN), "Connector Header Surface Mount 4 position 0.039 _1.00mm_", Package=None, Availability=Unavailable, MF="JST Sales", MP=BM04B-SRSS-TBT_LF__SN_, Price=None, SnapEDA_Link=https://www.snapeda.com/parts/BM04B-SRSS-TBT%28LF%29%28SN%29/JST%20Sales%20America%20Inc./view-part/1647403/?ref=snap
R1 R2 R8 R9 R10: library part CMP-1012-00331-1, "27R 0.1W 1% 0603 (1608 Metric)  SMD", Case-EIA=0603, Case-Metric=1608, Power="0.1 W", Tolerance="1 %", Technology=SMT
R3 R5 R7: library part CMP-1012-00510-1, "1K 0.1W 1% 0603 (1608 Metric)  SMD", Case-EIA=0603, Case-Metric=1608, Power="0.1 W", Tolerance="1 %", Technology=SMT
R4 R6 R23 R24: library part CMP-1012-00001-1, "Jumper 0603 (1608 Metric)", Case-EIA=0603, Case-Metric=1608, Power=None, Technology=SMT, Tolerance=None
R12 R15 R20 R21: library part CMP-1012-00397-1, "100R 0.1W 1% 0603 (1608 Metric)  SMD", Case-EIA=0603, Case-Metric=1608, Power="0.1 W", Tolerance="1 %", Technology=SMT
R17: library part CMP-1011-00810-1, "453K 0.063W 1% 0402 (1005 Metric)  SMD", Case-EIA=0402, Case-Metric=1005, Power="0.063 W", Tolerance="1 %", Technology=SMT
R18 R19: library part CMP-1012-00736-1, "100K 0.1W 1% 0603 (1608 Metric)  SMD", Case-EIA=0603, Case-Metric=1608, Power="0.1 W", Tolerance="1 %", Technology=SMT
R22: library part CMP-2100-03695-1, "Trimming Potentiometer, 10000 Ohm, -40 to 100 degC, 3-Pin SMD, RoHS, Tape and Reel", Case/Package=SMD/SMT, Colour=Silver, Manufacturer=Bourns, Max Operating Temperature=100degC, Max Power Dissipation=100mW, Min Operating Temperature=-40degC, Package Description="3-Pin Surface Mount Device, Body 3.8 x 3.6 mm", Package Quantity=2500, Package Reference=TC33X-2, Resistance=10KOhm, Temperature Coefficient=250ppm/degreesC, Tolerance=25%, Voltage Rating (DC)=50V, Composition=Potentiometer, Contact Plating=Silver, Datasheet URL=http://www.bourns.com/docs/Product-Datasheets/TC33.pdf, Datasheet Version=42583.0, Depth=3.8mm, Height=0.047inch, Lead Free=LeadFree, Length=3mm, Manufacturer URL=http://www.bourns.com/, Military Standard=Not, Mount=SurfaceMount, Number of Turns=1, Packaging=TapeandReel, Power Rating=100mW, Radiation Hardening=No, REACH SVHC=NoSVHC, RoHSCompliant=true, Taper=Linear, Termination=FootPrint, Weight=29.4mg, Width=0.118inch
SD1: library part CMP-2000-05825-1, "Micro SD Card, RA, -25 to 85 degC, 8-Pin SMD, RoHS, Tape and Reel", Current Rating=500mA, Manufacturer=Molex, Package Description="8-Pin Surface Mount Device, Body 11.95 x 11.4 mm, Pitch 1.1 mm", Voltage Rating=10VAC/DC, Brand=Molex, Card Type=microSD, Contact Material=PhosphorBronze, Contact Plating=Gold, Datasheet URL=http://www.molex.com/pdm_docs/sd/1040310811_sd.pdf, Datasheet Version="Rev. E, 04/2006", Height=1.42mm, Housing Material=LiquidCrystalPolymer(LCP), Insertion - Extraction Style=Push-Pull, Length=11.4mm, Manufacturer URL=http://www.molex.com/, Mating Cycles=10000, Mounting Technology=SurfaceMount, Mounting Type=Standard, Number of Contacts=8, Number of Rows=1Row, Orientation=RightAngle, Package Reference=104031-0811, Packaging=Reel, Pitch=1.1mm, Product=CardConnectors, Product Category=MemoryCardConnectors, RoHS=True, Series=104031, Termination Style=SMD
TP1 TP2 TP3 TP4 TP5 TP6 TP7 TP8 TP9 TP10 TP11 TP12 TP13 TP14 TP15 TP16: library part "0.1\" Pad-A.4"
U1: library part CMP-0248-00027-3, "IC USB SERIAL BASIC UART 12DFN", Case/Package=DFN, Max Operating Temperature=85°C, Max Supply Voltage=5.5V, Min Operating Temperature=-40°C, Min Supply Voltage=2.97V, Operating Supply Current=8mA, Operating Supply Voltage=5V, Package Quantity=5000, Data Rate=3Mbps, Height=0.75mm, Interface=UART, Lead Free="Lead Free", Length=3mm, Mount="Surface Mount", Number of Pins=12, Number of Ports=1, Number of Transceivers=1, Packaging="Tape and Reel", REACH SVHC="No SVHC", Width=3mm
U3: "CONN HEADER 10POS UNSHD VERT T/H", Current Rating="10 A", Manufacturer="Amphenol / FCI", Supplier Part Number 1=609-3712-ND, Voltage Rating="125 V", Brand=FCI, ComponentLink1Description=https://datasheet.ciiva.com/1433/1079612-1433267.pdf, ComponentLink1URL=https://datasheet.ciiva.com/1433/1079612-1433267.pdf, ComponentLink2Description=https://datasheet.ciiva.com/409/20021111-409158.pdf, ComponentLink2URL=https://datasheet.ciiva.com/409/20021111-409158.pdf, ComponentLink3Description=https://datasheet.ciiva.com/5131/20021111-5131386.pdf, ComponentLink3URL=https://datasheet.ciiva.com/5131/20021111-5131386.pdf, ComponentLink4Description=https://datasheet.ciiva.com/9465/20021111-9465402.pdf, ComponentLink4URL=https://datasheet.ciiva.com/9465/20021111-9465402.pdf, Contact Material=Nickel, Contact Plating=Gold, Factory Pack Quantity=93, Housing Material=Plastic, Manufacturer Part Number=20021111-00010T4LF, Mating Post Length="3.05 mm", Mounting Angle=Vertical, Mounting Style="Through Hole", Number of Positions=10, Number of Positions / Contacts=10, Number of Rows=2, Packaging=Tube, Pitch="1.27 mm", Product Category="Headers & Wire Housings", Product Type=Headers, RoHS=Details, Series=Minitek, Stack Height="2.5 mm", Supplier 1=Digi-Key, Termination Post Length="2.3 mm", Termination Style="Through Hole", Type=Unshrouded
U4: "RF TXRX MODULE WIFI TRACE ANT", Current - Receiving=-, Frequency=2.4GHz, Manufacturer=Atmel, Manufacturer Part Number=ATSAMW25H18-MR510PB, Operating Temperature="-40°C ~ 85°C", Package / Case=Module, Power - Output=17dBm, Supplier Part Number 1=ATSAMW25H18-MR510PB-ND, Voltage - Supply="2.7 V ~ 4.2 V", Antenna Type="Integrated, Trace", Category="RF/IF and RFID", ComponentLink1Description=http://www.atmel.com/devices/ATSAMW25.aspx, ComponentLink1URL=http://www.atmel.com/devices/ATSAMW25.aspx, ComponentLink2Description=http://www.farnell.com/datasheets/1965115.pdf, ComponentLink2URL=http://www.farnell.com/datasheets/1965115.pdf, Current - Transmitting=-, Data Rate=65Mbps, Family="RF Transceiver Modules", Memory Size="256kB Flash, 32kB SRAM", Modulation=-, Mounting Type="Surface Mount", Packaging=Tray, Pricing 1="1=19.14 (USD)", Protocol=802.11b/g/n, RF Family/Standard=WiFi, Sensitivity=-95.5dBm, Serial Interfaces="SPI, UART", Series="Xplained Pro", Stock 1=120, Supplier 1=Digikey
U5: library part CMP-12733-000002-1, "IC AMP CLASS D MONO 2.5W 8MSOP", Manufacturer="Diodes Inc.", Manufacturer Part Number=PAM8302AASCR, Max Junction Temp=+125°C, Max Supply Voltage=5.5V, Min Supply Voltage=2V, Nominal Supply Current=4mA, Package=MSOP-8, Power At Speaker R="2.5W @ 4Ω", Temperature="-40°C to +85°C", Temperature Range High=+85°C, Temperature Range Low=-40°C, Voltage Gain=24dB, Automotive=No, Category=IC, ComponentLink2Description=Datasheet, ComponentLink2URL=https://www.diodes.com/assets/Datasheets/PAM8302A.pdf, Device Class L1="Integrated Circuits (ICs)", Device Class L2="Linear ICs", Device Class L3="Amplifiers - Audio", Digikey Description="IC AMP CLASS D MONO 2.5W 8MSOP", Footprint Url=https://www.diodes.com/assets/Package-Files/MSOP-8.pdf, Height=1.1mm, Ipc Land Pattern Name=SOP65P490X110-8, Lead Free=Yes, Mouser Description="Audio Amplifiers 2.5W MONO FILTERLESS CLASS-D AUDIO AMP", Number Of Channels=1, Octopart=https://octopart.com/pam8302aascr-diodes+inc.-29030473, RoHS=TRUE, Standoff Height=0.05mm
U6: library part "2765 Thumbstick", "JOYSTICK 10K OHM 2 AXIS TH", Manufacturer="Adafruit Industries", Manufacturer Part Number=2765, Resistance=10kR, Supplier Part Number 1=1528-1730-ND, ComponentLink1Description=https://media.digikey.com/pdf/Data%20Sheets/Adafruit%20PDFs/2765_Web.pdf?src-supplier=Digi-Key, ComponentLink1URL=https://media.digikey.com/pdf/Data%20Sheets/Adafruit%20PDFs/2765_Web.pdf?src-supplier=Digi-Key, Height=0.472inch, Length=0.707inch, Mount="Through Hole", Packaging=Bulk, Pricing 1="1=2.50000 (USD)", RoHS=Yes, Stock 1=17, Supplier 1=Digi-Key, Width=0.697inch
X1: library part CMP-0447-00001-2, "Crystal, 32.768 kHz, 12.5 pF, -40 to 85 degC, SMD Low Profile 3.2 x 1.5 x 0.9 mm, Tape and Reel", Equivalent Series Resistance (R1)="70 Kohm", Frequency="32.768 kHz", Frequency Tolerance @+25degC="+/- 20 ppm", Insulation Resistance (Min)="500 Mohm", Load Capacitance (CL)="12.5 pF", Manufacturer=Abracon, Operating Temperature="-40 to 85 degC", Q Value (Type)=30000, Shunt Capacitance (C0)="0.9 to 1.2 pF", ComponentLink1Description="Manufacturer URL", ComponentLink1URL=http://www.abracon.com/, ComponentLink2Description=Datasheet, ComponentLink2URL=http://www.abracon.com/Resonators/ABS07.pdf, ComponentLink3Description="Package Specification", ComponentLink3URL=http://www.abracon.com/Resonators/ABS07.pdf, DatasheetVersion=04.03.13, Drive Level (Type)="0.1 uW", Mounting Technology="Surface Mount", Operation Mode="Flexural Mode (Tuning Fork)", PackageDescription="2-Pin Hand Drawn, Body 3.2x1.5mm, Pitch 2.5mm", PackageReference=ABS07-2, Packing="Tape and Reel", PartNumber=ABS07-32.768KHz-T

## Free pads (board coordinates)
  round 3.6 hole 2.7 paste-2.6: HH1(2.35,57.65) HH2(77.5,57.5) HH3(2.35,2.35) HH4(77.5,2.5)

## Via types
v1: diameter 0.5, hole 0.2, Top Layer to Bottom Layer, 11 vias
v2: diameter 0.5, hole 0.2, Top Layer to Bottom Layer, tented top, 5 vias

## Nets (pads, with @x,y where several pads share a name; then routed paths per layer and width w, separated by ;. In a path a pad name is that pad's centre, name@x,y a point inside that pad or via, vN(x,y) a via of type N, cw(c..) or ccw(c..) an arc to the next point about the centre after c; other vN are vias at no path point)
3V3: C10.2 C11.2 C15.2 R7.1 R11.2 R13.2 R14.2 R24.2 SD1.4 TP6.1 TP12.1 U3.1 U4.7 U4.21
6V: R22.2
6V_out: C20.2 C21.2 D2.2 R15.2 R22.1
BQ_BAT_TS: R6.1 TP5.1 U6.1
BQ_ILIM: R20.2 U6.12
BQ_ISET: R21.2 U6.16
CBUS0: D5.2 U1.6
FLASH_MEM_SPI_SS: R13.1 SD1.2 TP11.1 U4.37
GND: B1.3 B1.4 C1.1 C2.1 C3.1 C4.1 C5.1 C6.1 C7.1 C8.1 C9.1 C10.1 C11.1 C12.1 C13.1 C14.1 C15.1 C16.1 C17.1 C18.1 C19.1 C20.1 C21.1 C22.1 C23.1 C24.1 C25.1 C26.2 D1.1 J1.5 J1.6 J1.7 J1.8 J1.9 J1.10 J1.11 P1.1 R6.2 R16.1 R20.1 R21.1 SD1.6 SD1.10 SD1.11 SD1.12 TP3.1 TP13.1 U1.5 U1.13 U2.2 U3.3 U3.5 U3.9 U4.0 U4.1 U4.10 U4.17 U4.20 U4.32 U4.42 U4.51 U5.4 U5.5 U5.11 U6.4 U6.5 U6.8 U6.14 U6.15 U6.17 | length 11.3
  Top Layer w0.203: J1.5 12.465,54.26 12.548,54.178
  Top Layer w0.254: U4.0@11.512,24.009 11.512,26.191 13.73,26.191 U4.0@13.73,24.009 ; U3.9 38.202,19.99
  Top Layer w0.508: 12.548,54.178 12.573,54.153 14.053,54.153 14.351,53.855 14.351,53.645
  other v1: 160.54,18.769 161.54,18.769 161.04,19.519 160.54,20.269 161.54,20.269 10.545,44.559 11.545,44.559 10.545,45.459 11.545,45.459 10.545,46.359 11.545,46.359
  other v2: 148.475,36.24 149.475,36.24 148.975,36.74 148.475,37.24 149.475,37.24
MCU_LED: DS1.2 U4.16
MCU_RESET: C12.2 R11.1 R12.2 TP16.1 U3.10 U4.24
MCU_RX_UART_CLI: TP4.1 U1.7 U4.44
MCU_TX_UART_CLI: TP2.1 U1.10 U4.43
MEM_SPI_CLK: R10.2 SD1.5 TP10.1
MEM_SPI_MISO: R9.2 SD1.7 TP9.1
MEM_SPI_MOSI: R8.2 SD1.3 TP8.1
NetB1_1: B1.1 B1.2 R12.1
NetC9_2: C9.2 R24.1 U2.5
NetC22_2: C22.2 U5.10
NetC23_2: C23.2 R17.1
NetD2_1: D2.1 L1.2 U5.6 U5.7
NetD3_2: D3.2 R18.2
NetD4_2: D4.2 R19.2
NetD5_1: D5.1 R3.1
NetDS1_1: DS1.1 R7.2
NetR15_1: R15.1 R16.2 U5.2
NetR17_2: R17.2 U5.1
NetR18_1: R18.1 U6.9
NetR19_1: R19.1 U6.7
RS: C7.2 R4.2 R5.2 U1.2
SD_CARD_DETECT: R14.1 SD1.9 TP7.1
SERCOM1_PAD2_SPI_MISO: R9.1 U4.8
SERCOM1_PAD2_SPI_MOSI: R8.1 U4.11
SERCOM1_PAD3_SPI_SCK: R10.1 U4.12
SWCLK: TP15.1 U3.4 U4.25
SWDIO: TP14.1 U3.2 U4.26
USB_DATA_N: C5.2 D1.3 J1.2 R1.1 | length 6.7
  Top Layer w0.203: D1.3 D1.3@10.071,53.186 ; R1.1@10.262,49.822 10.61,50.17 10.75,50.17 10.869,50.289 10.869,50.577 10.792,50.654 10.792,52.464 D1.3@10.071,53.186 ; J1.2 10.614,55.393 10.614,54.581 10.711,54.483 10.711,53.827 D1.3@10.071,53.186
USB_DATA_P: C6.2 D1.2 J1.3 R2.1 | length 6.6
  Top Layer w0.203: J1.3@11.249,55.27 11.169,55.19 11.169,53.988 D1.2@11.97,53.186 ; R2.1 11.564,50.12 11.445,50.12 11.326,50.239 11.326,50.879 11.249,50.957 11.249,52.464 D1.2@11.97,53.186 ; D1.2 D1.2@11.97,53.186
USB_FTDI_DATA_N: R1.2 U1.1 | length 2.8
  Top Layer w0.203: U1.1 9.77,46.584 9.991,46.805 9.991,46.814 10.14,46.963 10.698,46.963 10.858,47.124 10.858,47.704 10.739,47.823 10.61,47.823 R1.2
USB_FTDI_DATA_P: R2.2 U1.12 | length 2.7
  Top Layer w0.203: R2.2 11.564,47.823 11.435,47.823 11.316,47.704 11.316,47.082 11.435,46.963 11.95,46.963 12.099,46.814 12.099,46.805 12.32,46.584 U1.12
VBAT: C26.1 P1.3 U6.2 U6.3
VBUS: C2.2 D1.4 FB1.1 J1.1 | length 7.5
  Top Layer w0.203: 9.865,54.295 J1.1
  Top Layer w0.508: 8.28,50.597 9.281,50.597 9.958,51.273 10.008,51.273 D1.4 10.02,51.874 9.545,52.349 9.22,52.349 8.992,52.578 8.992,53.997 9.289,54.295 9.865,54.295
VCCIO: C1.2 R4.1 U1.3 U1.9
VOUT: C8.2 C16.2 C17.2 C18.2 C19.2 L1.1 R23.2 U2.1 U2.3 U5.3 U5.8 U5.9
Vout_BQ: C25.2 D3.1 D4.1 R23.1 U6.6 U6.10 U6.11
VUSB: C3.2 C4.2 C24.2 FB1.2 R3.2 R5.1 TP1.1 U1.4 U6.13
XIN_32: C13.2 U4.29 X1.1
XOUT_32: C14.2 U4.30 X1.2
pads on no net: FD1. FD2. FD3. J1.4 P1.2 SD1.1 SD1.8 SD1.13 SD1.14 U1.8 U1.11 U2.4 U3.6 U3.7 U3.8 U4.2 U4.3 U4.4 U4.5 U4.6 U4.9 U4.13 U4.14 U4.15 U4.18 U4.19 U4.22 U4.23 U4.27 U4.28 U4.31 U4.33 U4.34 U4.35 U4.36 U4.38 U4.39 U4.40 U4.41 U4.45 U4.46 U4.47 U4.48 U4.49 U4.50

## Silkscreen, mask and mechanical layers (free items; w line width, h text height)
Mechanical 4:
  the board outline again, w0.508

## Text inside footprints (layer, text, board x,y; h text height)
J1: Mechanical 1 "Board edge" at 5.577,59.495 h0.2 r180